# EAGLE board Interface (EAGLE 9.6.2)
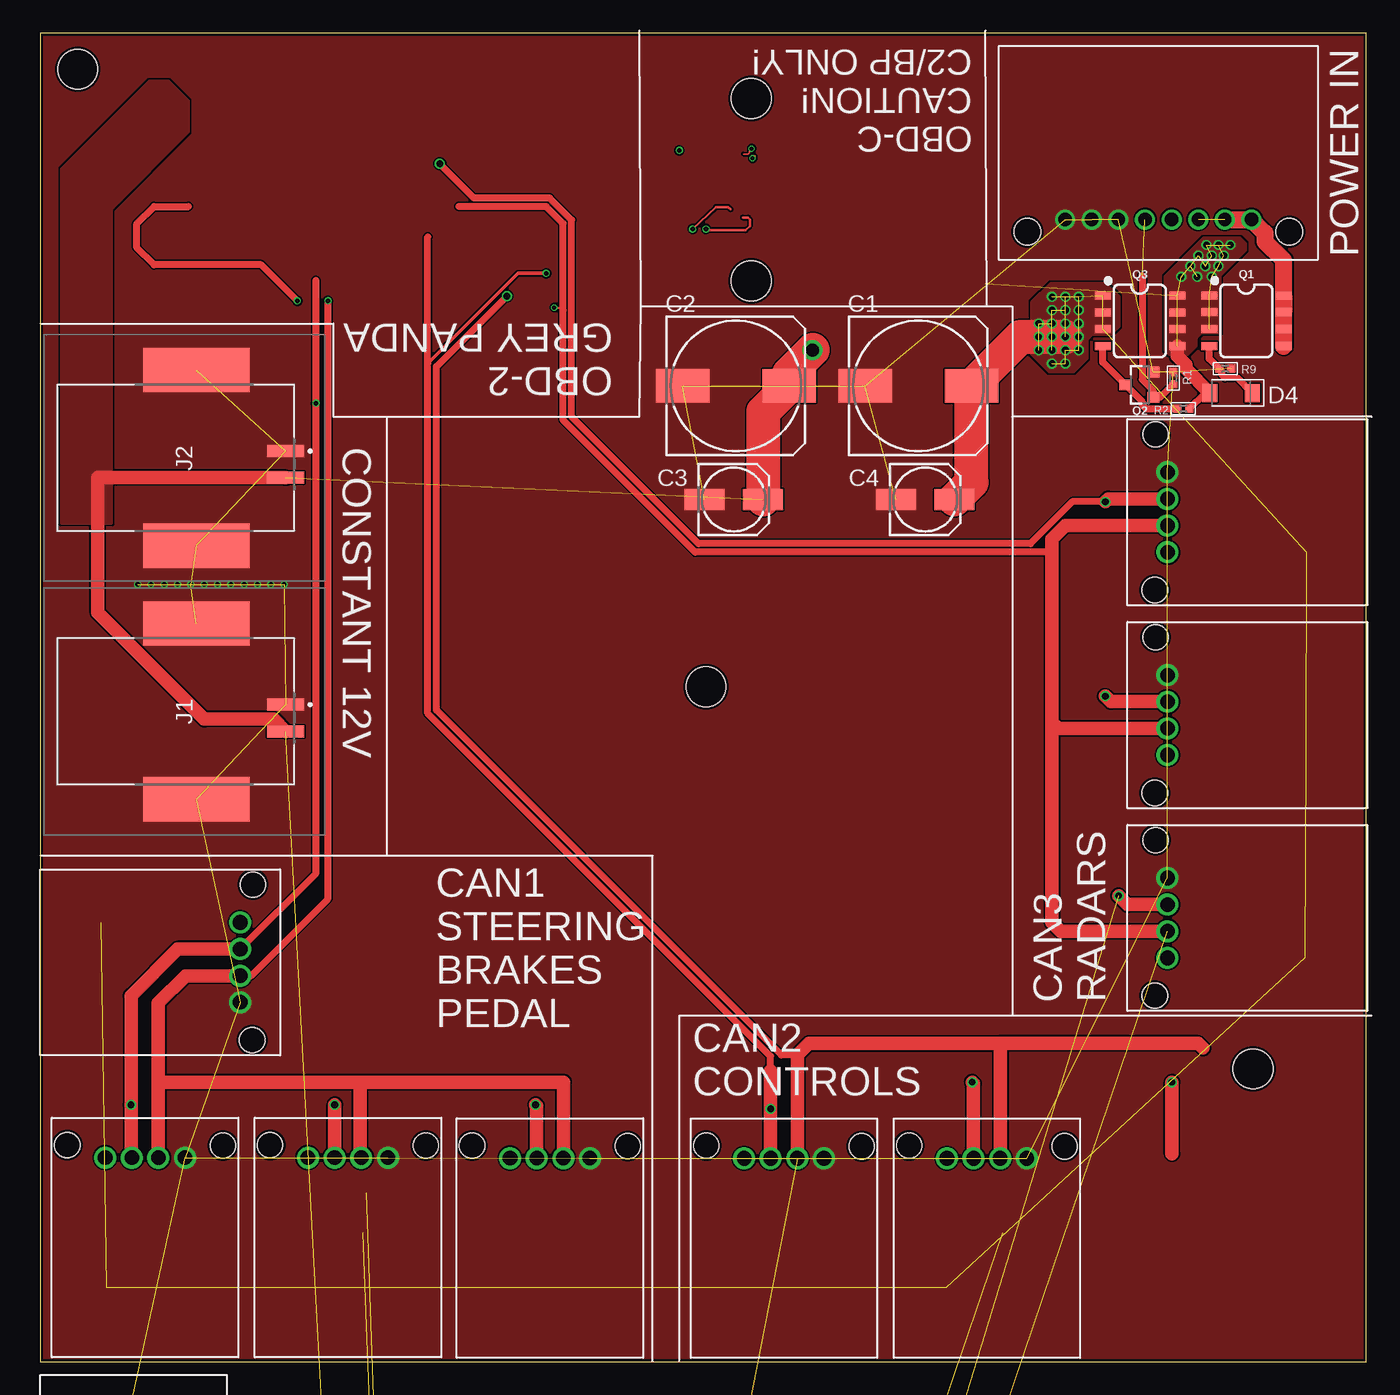
[diagram p0: board, top side]
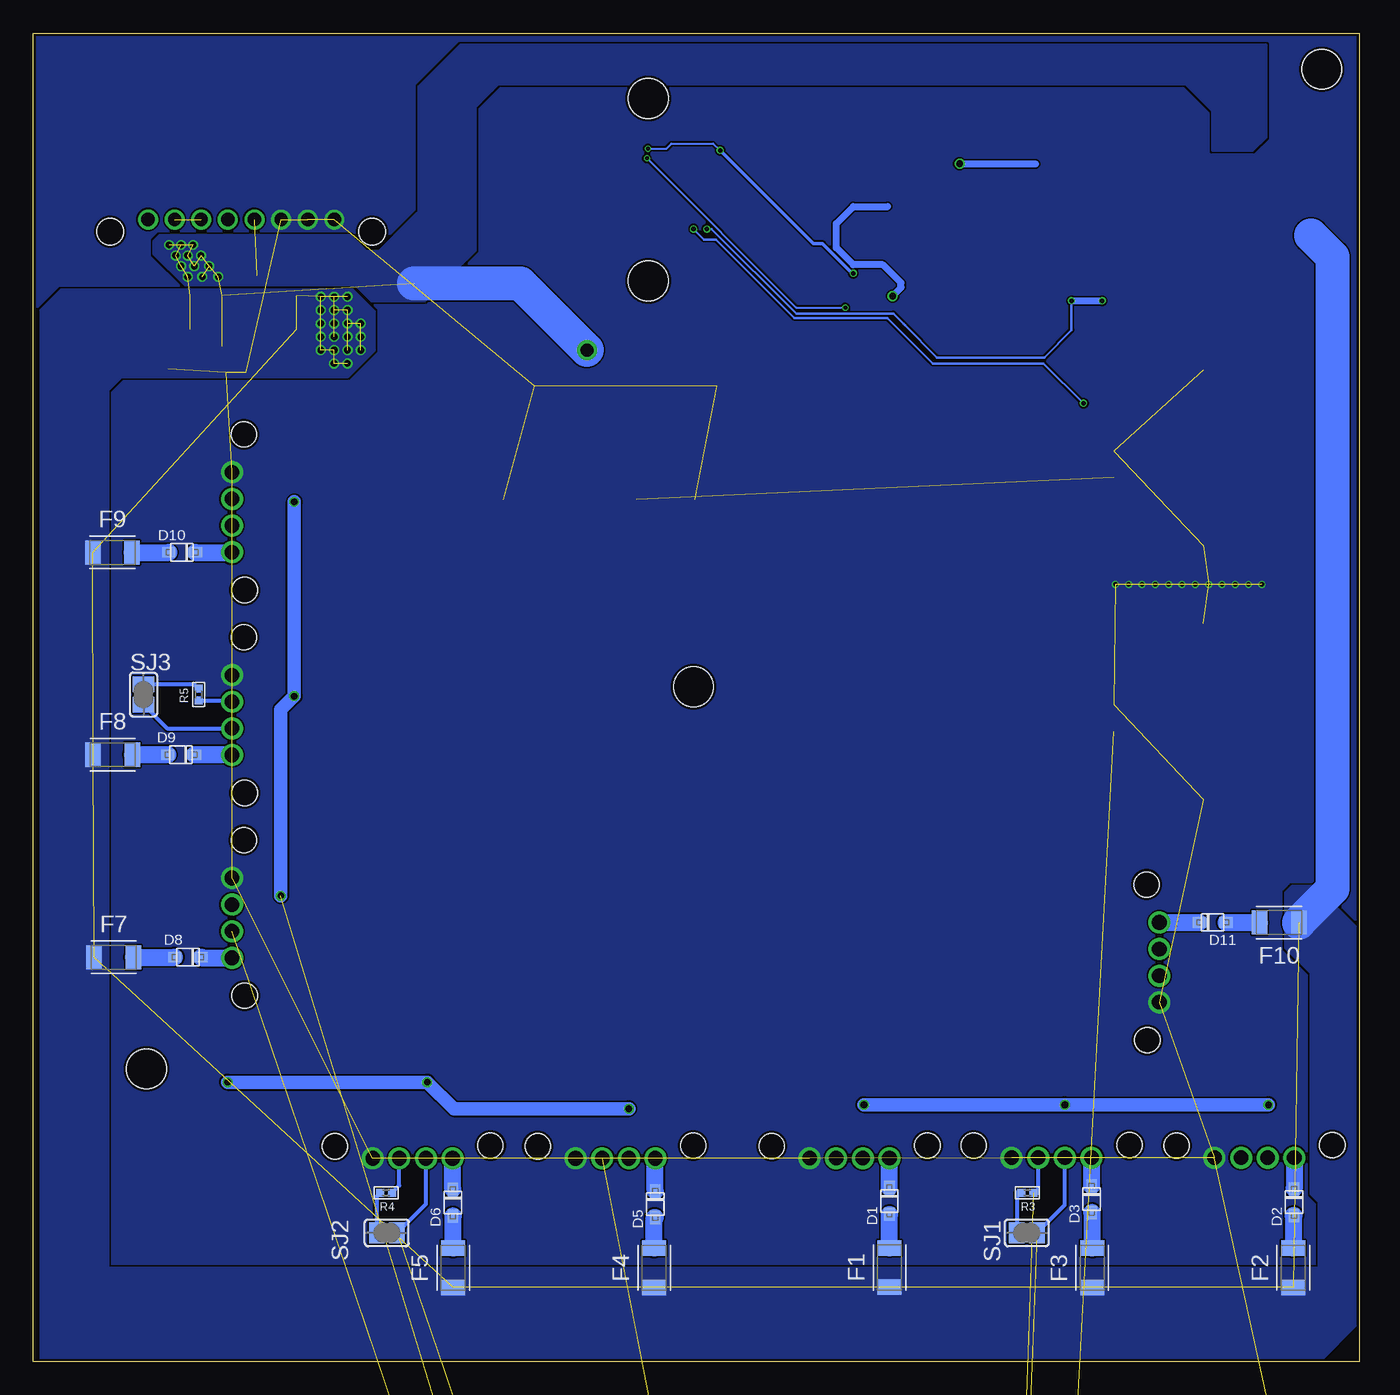
[diagram p1: board, bottom side, seen from below]

Size 99.6 x 99.8 mm. Coordinates in mm from the lower left corner, seen from the top.
Outline: 0,0 99.6,0 99.6,99.8 0,99.8 0,0
Copper layers (1*16): Top 0.035559375mm / dielectric 1.6mm / Bottom 0.035559375mm
Design rules "jlcpcb2layer": minimum track width 5mil, minimum drill 12mil, track to track 5mil, track to pad 5mil, pad to pad 5mil, via to via 5mil, smd to smd 5mil, copper to edge 8mil, drill to drill 6mil, minimum pad ring 5mil, minimum via ring 3mil, stop-mask expansion 2.5mil, vias tented up to drill 0mil, thermal gap 10mil
Holes 3 mm at 53.4,81.2 53.4,94.9 91.1,22 2.8,97.1 50,50.7

## Footprints (pad centres in the part's own frame; a part is rotated, then mirrored left to right if it is on the bottom)
153CLV-1010 = smd 4 x 2.5: + 4,0; - -4,0
MINI50 = drill 1.1: 1 0,0; 2 2,0; 3 4,0; 4 6,0 | hole 1.9: -2.85,-0.9; 8.85,-0.95
153CLV-0505 = smd 3 x 1.6: + 2.2,0; - -2.2,0
0603-C = smd 1.1 x 1: 1 -0.85,0; 2 0.85,0
SOD-323F = smd 1 x 0.8: A -1,0; C 1,0
SODFL3718X115 = smd 1.115 x 1.361: 1 -1.6,0; 2 1.6,0
FUSC3215X82N = smd 1.165 x 1.814: 1 -1.475,0; 2 1.475,0
SOT95P280X145-5N = smd 1.2 x 0.6: 1 -1.25,0.95; 2 -1.25,0; 3 -1.25,-0.95; 4 1.25,-0.95; 5 1.25,0.95
0349128020 = smd 0.9 x 2.75: 1 -0.5,6.72; 2 1.5,6.72 | smd 3.32 x 8: 3 -6.59,0; 4 6.61,0
USB-C-BREAKOUT_SPARKFUN-CONNECTORS_USB-C-16P = smd 0.3 x 1.45: A5 -1.25,0; A6 -0.25,0; A7 0.25,0; A8 1.25,0; B5 1.75,0; B6 0.75,0; B7 -0.75,0; B8 -1.75,0 | smd 0.6 x 1.45: GND -3.225,0; GND2 3.225,0 | smd 1 x 2.1: SHLD1 -4.32,-0.915; SHLD2 4.32,-0.915 | smd 1 x 2.1 bottom: SHLD3 -4.32,-0.915; SHLD4 4.32,-0.915 | smd 1 x 1.6: SHLD5 -4.32,-5.095; SHLD8 4.32,-5.095 | smd 1 x 1.6 bottom: SHLD6 -4.32,-5.095; SHLD7 4.32,-5.095 | smd 0.55 x 1.45: VBUS1 -2.45,0; VBUS2 2.45,0 | hole 0.65: -2.89,-1.445; 2.89,-1.445
SO08 = smd 0.6 x 1.2: 1 -1.905,-2.8; 2 -0.635,-2.8; 3 0.635,-2.8; 4 1.905,-2.8; 5 1.905,2.8; 6 0.635,2.8; 7 -0.635,2.8; 8 -1.905,2.8
SOT23-3 = smd 0.8 x 0.9: 1 -0.95,-1; 2 0.95,-1; 3 0,1.1
0402-R = smd 0.6 x 0.6: 1 -0.45,0; 2 0.45,0
TACTILE_SWITCH_SMD_6.0X3.5MM = smd 2.3 x 1.6: 1 -3.15,0; 2 3.15,0
SJ = smd 1.168 x 1.6: 1 -0.762,0; 2 0.762,0
LQFP64-10X10MM = smd 1.194 x 0.305: 1 -5.75,3.75; 2 -5.75,3.25; 3 -5.75,2.75; 4 -5.75,2.25; 5 -5.75,1.75; 6 -5.75,1.25; 7 -5.75,0.75; 8 -5.75,0.25; 9 -5.75,-0.25; 10 -5.75,-0.75; 11 -5.75,-1.25; 12 -5.75,-1.75; 13 -5.75,-2.25; 14 -5.75,-2.75; 15 -5.75,-3.25; 16 -5.75,-3.75; 33 5.75,-3.75; 34 5.75,-3.25; 35 5.75,-2.75; 36 5.75,-2.25; 37 5.75,-1.75; 38 5.75,-1.25; 39 5.75,-0.75; 40 5.75,-0.25; 41 5.75,0.25; 42 5.75,0.75; 43 5.75,1.25; 44 5.75,1.75; 45 5.75,2.25; 46 5.75,2.75; 47 5.75,3.25; 48 5.75,3.75 | smd 0.305 x 1.194: 17 -3.75,-5.75; 18 -3.25,-5.75; 19 -2.75,-5.75; 20 -2.25,-5.75; 21 -1.75,-5.75; 22 -1.25,-5.75; 23 -0.75,-5.75; 24 -0.25,-5.75; 25 0.25,-5.75; 26 0.75,-5.75; 27 1.25,-5.75; 28 1.75,-5.75; 29 2.25,-5.75; 30 2.75,-5.75; 31 3.25,-5.75; 32 3.75,-5.75; 49 3.75,5.75; 50 3.25,5.75; 51 2.75,5.75; 52 2.25,5.75; 53 1.75,5.75; 54 1.25,5.75; 55 0.75,5.75; 56 0.25,5.75; 57 -0.25,5.75; 58 -0.75,5.75; 59 -1.25,5.75; 60 -1.75,5.75; 61 -2.25,5.75; 62 -2.75,5.75; 63 -3.25,5.75; 64 -3.75,5.75
HVSON8 = smd 0.75 x 0.35: 1 -1.5,0.95; 2 -1.5,0.3; 3 -1.5,-0.35; 4 -1.5,-0.95; 5 1.5,-0.95; 6 1.5,-0.35; 7 1.5,0.3; 8 1.5,0.95 | smd 1.6 x 2.4: PAD 0,0
MINI50-8 = drill 1: P$1 0,0; P$2 2,0; P$3 4,0; P$4 6,0; P$5 8,0; P$6 10,0; P$7 12,0; P$8 14,0 | hole 2: -2.85,0.9; 16.85,0.9
RHB.32 = smd 0.85 x 0.28: 1 -2.475,1.75; 2 -2.475,1.25; 3 -2.475,0.75; 4 -2.475,0.25; 5 -2.475,-0.25; 6 -2.475,-0.75; 7 -2.475,-1.25; 8 -2.475,-1.75; 17 2.475,-1.75; 18 2.475,-1.25; 19 2.475,-0.75; 20 2.475,-0.25; 21 2.475,0.25; 22 2.475,0.75; 23 2.475,1.25; 24 2.475,1.75 | smd 0.28 x 0.85: 9 -1.75,-2.475; 10 -1.25,-2.475; 11 -0.75,-2.475; 12 -0.25,-2.475; 13 0.25,-2.475; 14 0.75,-2.475; 15 1.25,-2.475; 16 1.75,-2.475; 25 1.75,2.475; 26 1.25,2.475; 27 0.75,2.475; 28 0.25,2.475; 29 -0.25,2.475; 30 -0.75,2.475; 31 -1.25,2.475; 32 -1.75,2.475 | smd 3.15 x 3.15: PAD 0,0
XTAL-3.2X2.5 = smd 1.3 x 1.1: 1 0,-1.8; 2 2.3,-1.8; 3 2.3,-0.1; 4 0,-0.1

## Placement (x,y rotation side)
C1  [153CLV-1010]  65.95,73.31 0 top
C1-1  MINI50-4  [MINI50]  41.28,15.29 180 top
C1-2  MINI50-4  [MINI50]  10.86,15.33 180 top
C1-3  MINI50-4  [MINI50]  26.1,15.33 180 top
C1-4  MINI50-4  [MINI50]  15,27 90 top
C1-5  MINI50-4  [MINI50]  4,-16 0 top  (outside the outline)
C1-6  MINI50-4  [MINI50]  4,-46 0 top  (outside the outline)
C1-7  MINI50-4  [MINI50]  84.67,36.34 270 top
C1-8  MINI50-4  [MINI50]  84.67,51.58 270 top
C1-9  MINI50-4  [MINI50]  84.67,66.82 270 top
C2  [153CLV-1010]  52.25,73.31 0 top
C2-1  MINI50-4  [MINI50]  58.86,15.28 180 top
C2-2  MINI50-4  [MINI50]  74.1,15.28 180 top
C3  [153CLV-0505]  52.09,64.77 0 top
C4  [153CLV-0505]  66.47,64.77 0 top
C5  22p  [0603-C]  40,-109 0 top  (outside the outline)
C6  22p  [0603-C]  2,-113 0 top  (outside the outline)
C7  4.7u  [0603-C]  6,-113 0 top  (outside the outline)
C8  4.7u  [0603-C]  10,-113 0 top  (outside the outline)
C9  100n  [0603-C]  14,-113 0 top  (outside the outline)
C10  100n  [0603-C]  18,-113 0 top  (outside the outline)
C11  100n  [0603-C]  22,-113 0 top  (outside the outline)
C12  100n  [0603-C]  26,-113 0 top  (outside the outline)
C13  100n  [0603-C]  30,-113 0 top  (outside the outline)
C14  100n  [0603-C]  34,-113 0 top  (outside the outline)
C15  100n  [0603-C]  38,-113 0 top  (outside the outline)
C16  100n  [0603-C]  2,-117 0 top  (outside the outline)
C17  100n  [0603-C]  6,-117 0 top  (outside the outline)
C18  100n  [0603-C]  10,-117 0 top  (outside the outline)
C19  2.2u  [0603-C]  14,-117 0 top  (outside the outline)
C20  2.2u  [0603-C]  18,-117 0 top  (outside the outline)
D1  [SOD-323F]  35.28,12.07 90 bottom
D2  [SOD-323F]  4.88,11.99 90 bottom
D3  [SOD-323F]  20.08,12.21 90 bottom
D4  ZENER_DO-219-AB(SOD123F)  [SODFL3718X115]  89.45,72.78 180 top
D5  [SOD-323F]  52.88,11.83 90 bottom
D6  [SOD-323F]  68.08,11.95 90 bottom
D8  [SOD-323F]  87.98,30.4 0 bottom
D9  [SOD-323F]  88.5,45.6 0 bottom
D10  [SOD-323F]  88.42,60.8 0 bottom
D11  [SOD-323F]  11,33 180 bottom
D12  [SOD-323F]  3,-29 0 top  (outside the outline)
D13  [SOD-323F]  3,-59 0 top  (outside the outline)
F1  FUSE_CHIP-1206(3216-METRIC)  [FUSC3215X82N]  35.27,7.08 90 bottom
F2  FUSE_CHIP-1206(3216-METRIC)  [FUSC3215X82N]  4.94,7.06 90 bottom
F3  FUSE_CHIP-1206(3216-METRIC)  [FUSC3215X82N]  20.04,7.05 90 bottom
F4  FUSE_CHIP-1206(3216-METRIC)  [FUSC3215X82N]  52.96,7.06 90 bottom
F5  FUSE_CHIP-1206(3216-METRIC)  [FUSC3215X82N]  68.06,7.05 90 bottom
F7  FUSE_CHIP-1206(3216-METRIC)  [FUSC3215X82N]  93.55,30.38 0 bottom
F8  FUSE_CHIP-1206(3216-METRIC)  [FUSC3215X82N]  93.64,45.6 0 bottom
F9  FUSE_CHIP-1206(3216-METRIC)  [FUSC3215X82N]  93.65,60.8 0 bottom
F10  FUSE_CHIP-1206(3216-METRIC)  [FUSC3215X82N]  6,33 180 bottom
F11  FUSE_CHIP-1206(3216-METRIC)  [FUSC3215X82N]  15,-23 0 top  (outside the outline)
F12  FUSE_CHIP-1206(3216-METRIC)  [FUSC3215X82N]  15,-53 0 top  (outside the outline)
IC1  MIC5233-3.3YM5-TR  [SOT95P280X145-5N]  9,-109 0 top  (outside the outline)
J1  34912-8020  [0349128020]  11.7,48.86 270 top
J2  34912-8020  [0349128020]  11.7,67.91 270 top
J3  [USB-C-BREAKOUT_SPARKFUN-CONNECTORS_USB-C-16P]  5,-128 0 top  (outside the outline)
PS1  MIC5233-5.0YM5-TR  [SOT95P280X145-5N]  28,-109 0 top  (outside the outline)
Q1  6.5A/20V/35mΩ  [SO08]  90.6,78.2 270 top
Q2  5.8A/30V/35mΩ  [SOT23-3]  82.6,73.39 90 top
Q3  6.5A/20V/35mΩ  [SO08]  82.6,78.19 270 top
R1  10k  [0402-R]  85.1,73.89 270 top
R2  10k  [0402-R]  85.87,71.6 0 top
R3  120  [0402-R]  24.93,12.7 180 bottom
R4  120  [0402-R]  73.09,12.7 180 bottom
R5  120  [0402-R]  87.19,50.11 90 bottom
R6  22  [0402-R]  42,-116 0 top  (outside the outline)
R7  22  [0402-R]  2,-120 0 top  (outside the outline)
R9  10k  [0402-R]  89,74.6 180 top
R15  10k  [0402-R]  33,-116 0 top  (outside the outline)
R16  10k  [0402-R]  36,-116 0 top  (outside the outline)
S1  MOMENTARY-SWITCH-SPST-SMD-6.0X3.5MM  [TACTILE_SWITCH_SMD_6.0X3.5MM]  27,-96 0 top  (outside the outline)
S2  MOMENTARY-SWITCH-SPST-SMD-6.0X3.5MM  [TACTILE_SWITCH_SMD_6.0X3.5MM]  10,-104 0 top  (outside the outline)
SJ1  [SJ]  24.96,9.68 0 bottom
SJ2  [SJ]  73.04,9.68 0 bottom
SJ3  [SJ]  91.32,50.12 270 bottom
U1  STM32F413RGT6  [LQFP64-10X10MM]  22,-67 0 top  (outside the outline)
U2  TJA1042HVSON  [HVSON8]  27,-104 0 top  (outside the outline)
U3  TJA1042HVSON  [HVSON8]  32,-104 0 top  (outside the outline)
U4  TJA1042HVSON  [HVSON8]  37,-104 0 top  (outside the outline)
U$1  MINI50-8  [MINI50-8]  90.98,85.81 180 top
U$2  TPS25830  [RHB.32]  3,-124 0 top  (outside the outline)
Y1  CRYSTAL-3.2X2.54-PIN  [XTAL-3.2X2.5]  21,-103 0 top  (outside the outline)

## Library data of the parts
C1-C4 = rcl; SPICEPREFIX: C
C1-1-C1-9 C2-1 C2-2 R1-R5 R9 U$1 = interceptor
C5-C20 R6 R7 R15 R16 U2-U4 Y1 = comma.ai
D1-D3 D5 D6 D8-D13 = adafruit
D4 = Diode; CATEGORY: Diode; SUB-CATEGORY: Zener
F1-F5 F7-F12 = Circuit-Protection; CATEGORY: Circuit-Protection; SUB-CATEGORY: Fuse
IC1 = SamacSys_Parts; DESCRIPTION: High Input Voltage Low IQ UCAP LDO Regulator; HEIGHT: 1.45mm; MANUFACTURER_NAME: Microchip; MANUFACTURER_PART_NUMBER: MIC5233-3.3YM5-TR; MOUSER_PART_NUMBER: 998-MIC5233-3.3YM5TR; MOUSER_PRICE-STOCK: https://www.mouser.co.uk/ProductDetail/Microchip-Technology-Micrel/MIC5233-33YM5-TR?qs=U6T8BxXiZAWDhshLMgpaLQ%3D%3D
J1 J2 = SamacSys_Parts; DESCRIPTION: Molex Mini50 Series, 34912 Series Number, 1 Row 2 Way Surface Mount Plug PCB Header, with SMT Termination Method; HEIGHT: 9mm; MANUFACTURER_NAME: Molex; MANUFACTURER_PART_NUMBER: 34912-8020; MOUSER_PART_NUMBER: 538-34912-8020; MOUSER_PRICE-STOCK: https://www.mouser.co.uk/ProductDetail/Molex/34912-8020?qs=jj7GbYRQuObyP9O5PVDUYw%3D%3D
J3 = ROTR-Wireless; PROD_ID: CONN-14122
PS1 = SamacSys_Parts; DESCRIPTION: MICROCHIP - MIC5233-5.0YM5-TR - LDO, REG, 36VIN, 0.1A, 5V, 2%, 5SOT23; HEIGHT: 1.45mm; MANUFACTURER_NAME: Microchip; MANUFACTURER_PART_NUMBER: MIC5233-5.0YM5-TR; MOUSER_PART_NUMBER: 998-MIC5233-5.0YM5TR; MOUSER_PRICE-STOCK: https://www.mouser.co.uk/ProductDetail/Microchip-Technology-Micrel/MIC5233-50YM5-TR?qs=U6T8BxXiZAWSnpCHgrMajw%3D%3D
Q1 Q3 = SparkFun-DiscreteSemi; PROD_ID: TRANS-08355
Q2 = SparkFun-DiscreteSemi; PROD_ID: TRANS-12988
S1 S2 = SparkFun-Switches; PROD_ID: SWCH-00815; SF_SKU: COM-08229
SJ1-SJ3 = jumper
U1 = interceptor; BUILT_BY: EMA_UL_Team; COPYRIGHT: Copyright (C) 2018 Accelerated Designs. All rights reserved; MANUFACTURER_PART_NUMBER: STM32F413RGT6; SOURCELIBRARY: Updates_to_database_2020-10-19; VENDOR: STMicroelectronics
U$2 = packages(ti)

## Nets
3.3V: C8.1 C9.1 C10.1 C11.1 C12.1 C14.1 C17.1 C18.1 C20.1 IC1.5 R16.2 S2.2 U1.13 U1.19 U1.32 U1.48 U1.64 U2.5 U3.5 U4.5
5V: C13.1 C15.1 C16.1 C19.1 IC1.1 IC1.3 PS1.5 U2.3 U3.3 U4.3
12V: C2.+ C3.+ D4.2 J1.2 J2.2 PS1.1 PS1.3 Q1.1 Q1.2 Q1.3 Q3.5 Q3.6 Q3.7 Q3.8 R2.2
12VIGN: C1.+ C4.+ F1.1 F2.1 F3.1 F4.1 F5.1 F7.1 F8.1 F9.1 F10.1 Q3.1 Q3.2 Q3.3
12VIGN1: F11.1
12VIGN2: F12.1
CAN1_EN: U1.9 U2.8
CAN1_H: C1-1.3 C1-2.3 C1-3.3 C1-4.3 SJ1.2 U2.7
CAN1_L: C1-1.2 C1-2.2 C1-3.2 C1-4.2 R3.1 U2.6
CAN1_RX: U1.61 U2.4
CAN1_TX: U1.62 U2.1
CAN1H1: C1-5.3
CAN1H2: C1-6.3
CAN1L1: C1-5.2
CAN1L2: C1-6.2
CAN2_EN: U1.2 U3.8
CAN2_H: C2-1.3 C2-2.3 SJ2.2 U3.7
CAN2_L: C2-1.2 C2-2.2 R4.1 U3.6
CAN2_RX: U1.57 U3.4
CAN2_TX: U1.58 U3.1
CAN3_EN: U1.14 U4.8
CAN3_H: C1-7.3 C1-8.3 C1-9.3 SJ3.2 U4.7
CAN3_L: C1-7.2 C1-8.2 C1-9.2 R5.1 U4.6
CAN3_RX: U1.41 U4.4
CAN3_TX: U1.50 U4.1
GND: C1-1.1 C1-2.1 C1-3.1 C1-4.1 C1-5.1 C1-6.1 C1-7.1 C1-8.1 C1-9.1 C1.- C2-1.1 C2-2.1 C2.- C3.- C4.- C5.2 C6.2 C7.2 C8.2 C9.2 C10.2 C11.2 C12.2 C13.2 C14.2 C15.2 C16.2 C17.2 C18.2 C19.2 C20.2 IC1.2 J1.1 J1.3 J1.4 J2.1 J2.3 J2.4 PS1.2 Q2.2 R1.1 R9.1 R15.1 S1.2 U1.12 U1.18 U1.31 U1.47 U1.63 U2.2 U2.PAD U3.2 U3.PAD U4.2 U4.PAD U$1.P$6 U$1.P$7 U$1.P$8
N$1: D1.A F1.2
N$2: C1-1.4 D1.C
N$3: D2.A F2.2
N$4: C1-2.4 D2.C
N$5: D3.A F3.2
N$6: C1-3.4 D3.C
N$7: R3.2 SJ1.1
N$8: D5.A F4.2
N$9: C2-1.4 D5.C
N$10: Q1.5 Q1.6 Q1.7 Q1.8 U$1.P$1 U$1.P$2 U$1.P$3
N$11: D6.A F5.2
N$12: Q2.1 R1.2 U$1.P$5
N$13: C2-2.4 D6.C
N$14: C5.1 U1.5 Y1.3
N$15: Q2.3 Q3.4 R2.1
N$16: R7.2 U1.44
N$17: R4.2 SJ2.1
N$18: D8.A F7.2
N$19: C1-7.4 D8.C
N$20: D9.A F8.2
N$21: C1-8.4 D9.C
N$22: D10.A F9.2
N$23: C1-9.4 D10.C
N$24: R5.2 SJ3.1
N$25: D12.A F11.2
N$26: D4.1 Q1.4 R9.2
N$27: D11.A F10.2
N$28: C1-4.4 D11.C
N$29: C1-5.4 D12.C
N$30: D13.A F12.2
N$31: C1-6.4 D13.C
N$32: R6.2 U1.45
N$33: J3.A5 U$2.20
N$34: J3.B5 U$2.19
N$35: R6.1
N$36: R7.1
N$37: J3.A6 J3.B6 U$2.18
N$38: R16.1 S1.1 U1.7
N$39: R15.2 S2.1 U1.60
N$40: C7.1 U1.30
N$41: J3.A7 J3.B7 U$2.17
N$42: J3.VBUS1 J3.VBUS2 U$2.15
N$43: C6.1 U1.6 Y1.1
N$44: J3.GND J3.GND2 J3.SHLD1 J3.SHLD2 J3.SHLD3 J3.SHLD4 J3.SHLD5 J3.SHLD6 J3.SHLD7 J3.SHLD8
PWRON: U1.33
VBAT: U1.1

## Tracks (layer width: path | path; a pad name or v marks a point on that pad's centre or on a via)
3.3V  (19 unrouted)
5V  (9 unrouted)
12V  (via drill 0.5, 1)  (22 unrouted)
  Top 0.508: R2.2 87.5,72.78 D4.2
  Top 1.016: J2.2 4.31,66.41 4.31,56.28 12.32,48.27 17.5,48.27 J1.2 | D4.2 86.03,74.59 86.03,74.9 85.4,75.54 Q3.5
  Top 2.54: C3.+ 54.29,71.35 C2.+ 56.25,74.25 v58,76
  Bottom 2.54: v58,76 63,81 71,81
  other vias: 87.6,83.9 88.5,83.9 89.4,83.9 87,83.1 88,83.1 88.9,83.1 86.4,82.3 87.5,82.3 88.5,82.3 85.7,81.5 86.9,81.5 88,81.5
  pour Top (no thermals): 87,84 84.5,81.5 84.5,76 84.8,75.7 86.2,75.7 86.8,76.3 86.8,76.9 87.2,77.3 88.6,77.3 88.6,81.6 90.5,83.5 90.5,84 90.1,84.4 87.4,84.4
  pour Bottom (no thermals): 75.4,80.9 74.2,79.7 70.2,79.7 66.4,83.5 66.4,94.3 64.7,96 7,96 7,98.9 67.5,98.9 70.6,95.8 70.6,86.4 73.6,83.4 74.6,83.4 75.8,84.6 90.1,84.6 90.5,84.2 90.5,83.2 88.2,80.9
  pour Top (no thermals): 1.6,63 5.3,63 5.3,86.6 11.1,92.4 11.1,94.7 9.6,96.2 8.2,96.2 1.6,89.6
  pour Bottom (no thermals): 13,96 11,94 11,91 8,91 7,92 7,96
12VIGN  (via drill 0.5)  (31 unrouted)
  Top 2.54: C4.+ 69.95,66.05 C1.+ 73.64,77 v77,77
  Bottom 2.54: 3.6,84.6 2,83 2,35.52 F10.1
  other vias: 78,80 77,80 76,80 76,79 77,79 78,79 78,78 77,78 76,78 75,78 75,77 76,77 78,77 78,76 77,76 76,76 75,76 76,75 77,75
  pour Top (no thermals): 81,80 80,81 75.9,81 74.5,79.6 74.5,75.7 75.8,74.4 77.6,74.4 78.6,75.4 78.6,76.8 79,77.2 80.4,77.2 81,77.8
  pour Bottom (no thermals): 99,3 99,79 97.5,80.5 75.6,80.5 74,78.9 74,76 76,74 93,74 94,73 94,3
  pour Bottom (no thermals): 99,0 99,7 3,7 3,0
  pour Bottom (no thermals): 3,0 3,12 3.6,12.6 3.6,29.2 5.5,31.1 5.5,35.2 5,35.7 3.3,35.7 0.2,32.6 0.2,2.8
CAN1_EN  (1 unrouted)
CAN1_H  (via drill 0.35, 0.5)  (1 unrouted)
  Top 0.203: 52.76,85.95 53.16,85.95 53.29,85.81 53.29,85.33 52.97,85 50.1,85 v50,85.1
  Top 0.508: C1-4.3 20.7,36.7 v20.7,72 20.7,81.23
  Top 1.016: C1-4.3 10.3,31 6.8,27.5 v6.8,19.3 6.8,15.39 C1-2.3 | C1-3.3 v22.1,19.3 | C1-1.3 37.28,19.22 v37.2,19.3
  Bottom 0.203: v20.7,72 23.7,75 32,75 35.41,78.41 42.41,78.41 48.3,84.3 49.2,84.3 v50,85.1
  Bottom 0.305: SJ1.2 22.1,11.78 C1-3.3
  Bottom 1.016: v6.8,19.3 v22.1,19.3 v37.2,19.3
CAN1_L  (via drill 0.35)  (1 unrouted)
  Top 0.203: 51.84,86.57 51.66,86.75 50.75,86.75 v49,85.1
  Top 0.508: C1-4.2 15.83,29 21.6,34.77 v21.6,79.7 | v19.3,79.7 16.59,82.41 8.53,82.41 7.25,83.69 7.25,85.51 8.53,86.79 11.12,86.79
  Top 1.016: C1-4.2 10.9,29 8.86,26.96 8.86,21 | 8.86,21 C1-2.2 | C1-3.2 24,15.43 24,21 | 24,21 8.86,21 | C1-1.2 39.28,20.98 39.3,21 24,21
  Bottom 0.203: v21.6,79.7 21.6,77.5 23.65,75.45 31.7,75.45 34.12,77.88 34.24,78 34.99,78.74 42.27,78.74 48.63,85.1 v49,85.1
  Bottom 0.305: R3.1 24.1,12.7 C1-3.2
  Bottom 0.508: v21.6,79.7 v19.3,79.7
CAN1_RX  (1 unrouted)
CAN1_TX  (1 unrouted)
CAN2_EN  (1 unrouted)
CAN2_H  (via drill 0.3, 0.35, 0.5)  (1 unrouted)
  Top 0.127: 52.8,90.73 53.14,90.73 53.26,90.84 53.26,90.97 v53.42,91.14
  Top 0.254: 29.1,75 35.87,81.77 v38,81.77
  Top 0.508: 54.86,21.86 54.86,22.94 29.1,48.7 29.1,75 29.1,84.52
  Top 1.016: 54.86,21.86 v54.86,19 C2-1.3 | 85,15.62 v85,21 | C2-2.3 70.1,20.9 v70,21
  Bottom 0.15: v53.42,91.14 52.04,91.14 51.65,91.52 48.52,91.52 v48,91
  Bottom 0.254: v38,81.77 38.14,81.9 38.2,81.9 40.3,84 41,84 v48,91
  Bottom 0.305: SJ2.2 70.1,11.86 C2-2.3
  Bottom 1.016: v85,21 v70,21 68,19 v54.86,19
CAN2_L  (via drill 0.5)  (1 unrouted)
  Top 0.508: 56.86,23.04 55.66,23.04 29.75,48.95 29.75,74.76 v35.05,80.06
  Top 1.016: C2-1.2 56.86,23.04 57.72,23.9 72,23.9 | 72,23.9 72.1,23.8 C2-2.2 | 72,23.9 87,23.9 87.34,23.56
  Bottom 0.305: R4.1 72.1,13.24 C2-2.2
  Bottom 0.508: 35.4,86.79 37.99,86.79 39.27,85.51 39.27,83.69 37.99,82.41 35.76,82.41 34.4,81.06 34.4,80.7 v35.05,80.06
CAN2_RX  (1 unrouted)
CAN2_TX  (1 unrouted)
CAN3_EN  (1 unrouted)
CAN3_H  (via drill 0.3)  (1 unrouted)
  Top 0.15: 53.67,90.57 v53.5,90.4 | v38.6,79.2 39.07,79.2 39.27,79
  Top 0.508: 76,60.82 49.18,60.82 39.27,70.73 39.27,79 39.27,85.51 37.99,86.79 31.45,86.79
  Top 1.016: C1-7.3 76.66,32.34 76,33 76,48 | 76,48 76,60.82 76,61.82 77,62.82 C1-9.3 | C1-8.3 76.42,47.58 76,48
  Bottom 0.15: v53.5,90.4 42.3,79.2 v38.6,79.2
  Bottom 0.305: SJ3.2 89.54,47.58 C1-8.3
CAN3_L  (via drill 0.5)  (1 unrouted)
  Top 0.508: v80,64.6 77.52,64.6 74.38,61.45 49.45,61.45 39.91,71 39.91,85.77 38.26,87.42 32.58,87.42 v30,90
  Top 1.016: C1-7.2 81.66,34.34 v81,35 | v80,64.6 80.22,64.82 C1-9.2 | C1-8.2 80.42,49.58 v80,50
  Bottom 0.305: R5.1 84.75,49.66 C1-8.2
  Bottom 0.508: v30,90 24.29,90
  Bottom 1.016: v81,35 81,49 v80,50 v80,64.6
CAN3_RX  (1 unrouted)
CAN3_TX  (1 unrouted)
GND  (via drill 0.35)  (69 unrouted)
  other vias: 8.3,58.4 9.3,58.4 10.3,58.4 11.3,58.4 12.3,58.4 13.3,58.4 14.3,58.4 15.3,58.4 16.3,58.4 17.3,58.4 18.3,58.4 7.3,58.4
  pour Top (rank 2, no thermals): 0,0 99.6,0 99.6,99.8 0,99.8
  pour Bottom (rank 2, no thermals): 0,0 99.6,0 99.6,99.8 0,99.8
N$1
  Bottom 1.27: F1.2 D1.A
N$2
  Bottom 1.27: D1.C C1-1.4
N$3
  Bottom 1.27: D2.A 4.94,10.99 F2.2
N$4
  Bottom 1.27: C1-2.4 4.88,15.33 D2.C
N$5
  Bottom 1.27: F3.2 20.04,11.21 D3.A
N$6
  Bottom 1.27: C1-3.4 20.1,13.21 D3.C
N$7
  Bottom 0.305: R3.2 25.72,12.7 SJ1.1
N$8
  Bottom 1.27: F4.2 52.96,10.83 D5.A
N$9
  Bottom 1.27: D5.C 52.88,15.28 C2-1.4
N$10  (1 unrouted)
  Top 1.27: U$1.P$2 U$1.P$1 91.99,84.8 91.99,84.15 93.4,82.74 Q1.7 | Q1.5 Q1.6 Q1.7 | Q1.8 Q1.7
N$11
  Bottom 1.27: F5.2 68.06,10.95 D6.A
N$12  (1 unrouted)
  Top 0.508: 82.77,81.6 82.77,73.78 83.6,72.95 Q2.1 84.1,72.44 R1.2
N$13
  Bottom 1.27: D6.C 68.08,15.28 C2-2.4
N$14  (2 unrouted)
N$15
  Top 0.508: R2.1 83.05,71.6 82.77,71.88 82.77,72.12 Q2.3 79.8,75.09 Q3.4
N$16  (1 unrouted)
N$17
  Bottom 0.305: R4.2 73.8,12.44 SJ2.1
N$18
  Bottom 1.27: F7.2 88.98,30.38 D8.A
N$19
  Bottom 1.27: D8.C 86.98,30.34 C1-7.4
N$20
  Bottom 1.27: F8.2 D9.A
N$21
  Bottom 1.27: D9.C 84.67,45.6 C1-8.4
N$22
  Bottom 1.27: F9.2 D10.A
N$23
  Bottom 1.27: D10.C 84.67,60.8 C1-9.4
N$24
  Bottom 0.305: R5.2 87.51,50.88 SJ3.1
N$25  (1 unrouted)
N$26
  Top 0.508: Q1.4 87.8,75.35 R9.2 88.77,74.38 88.77,74.14 88.99,73.92 89.91,73.92 D4.1
N$27
  Bottom 1.27: D11.A F10.2
N$28
  Bottom 1.27: C1-4.4 D11.C
N$29  (1 unrouted)
N$30  (1 unrouted)
N$31  (1 unrouted)
N$32  (1 unrouted)
N$33  (1 unrouted)
N$34  (1 unrouted)
N$37  (1 unrouted)
N$38  (2 unrouted)
N$39  (2 unrouted)
N$40  (1 unrouted)
N$41  (2 unrouted)
N$42  (2 unrouted)
N$43  (2 unrouted)
N$44  (2 unrouted)

## Text on the board
tNames: OBD-C / CAUTION! / C2/BP ONLY! | POWER IN | OBD-2 / GREY PANDA | CONSTANT 12V | CAN3 / RADARS | CAN1 / STEERING / BRAKES / PEDAL | CAN2 / CONTROLS